# Altium PCB DieuKhienThietBiWinForm.PcbDoc
Units mil, origin at the board's own origin, x right, y up, seen from the top; angles counter-clockwise.
Board outline 5625 x 3706 mil, 2 copper layers (Top Layer, Bottom Layer); 50 components, 61 nets, 206 pads, 6 vias.
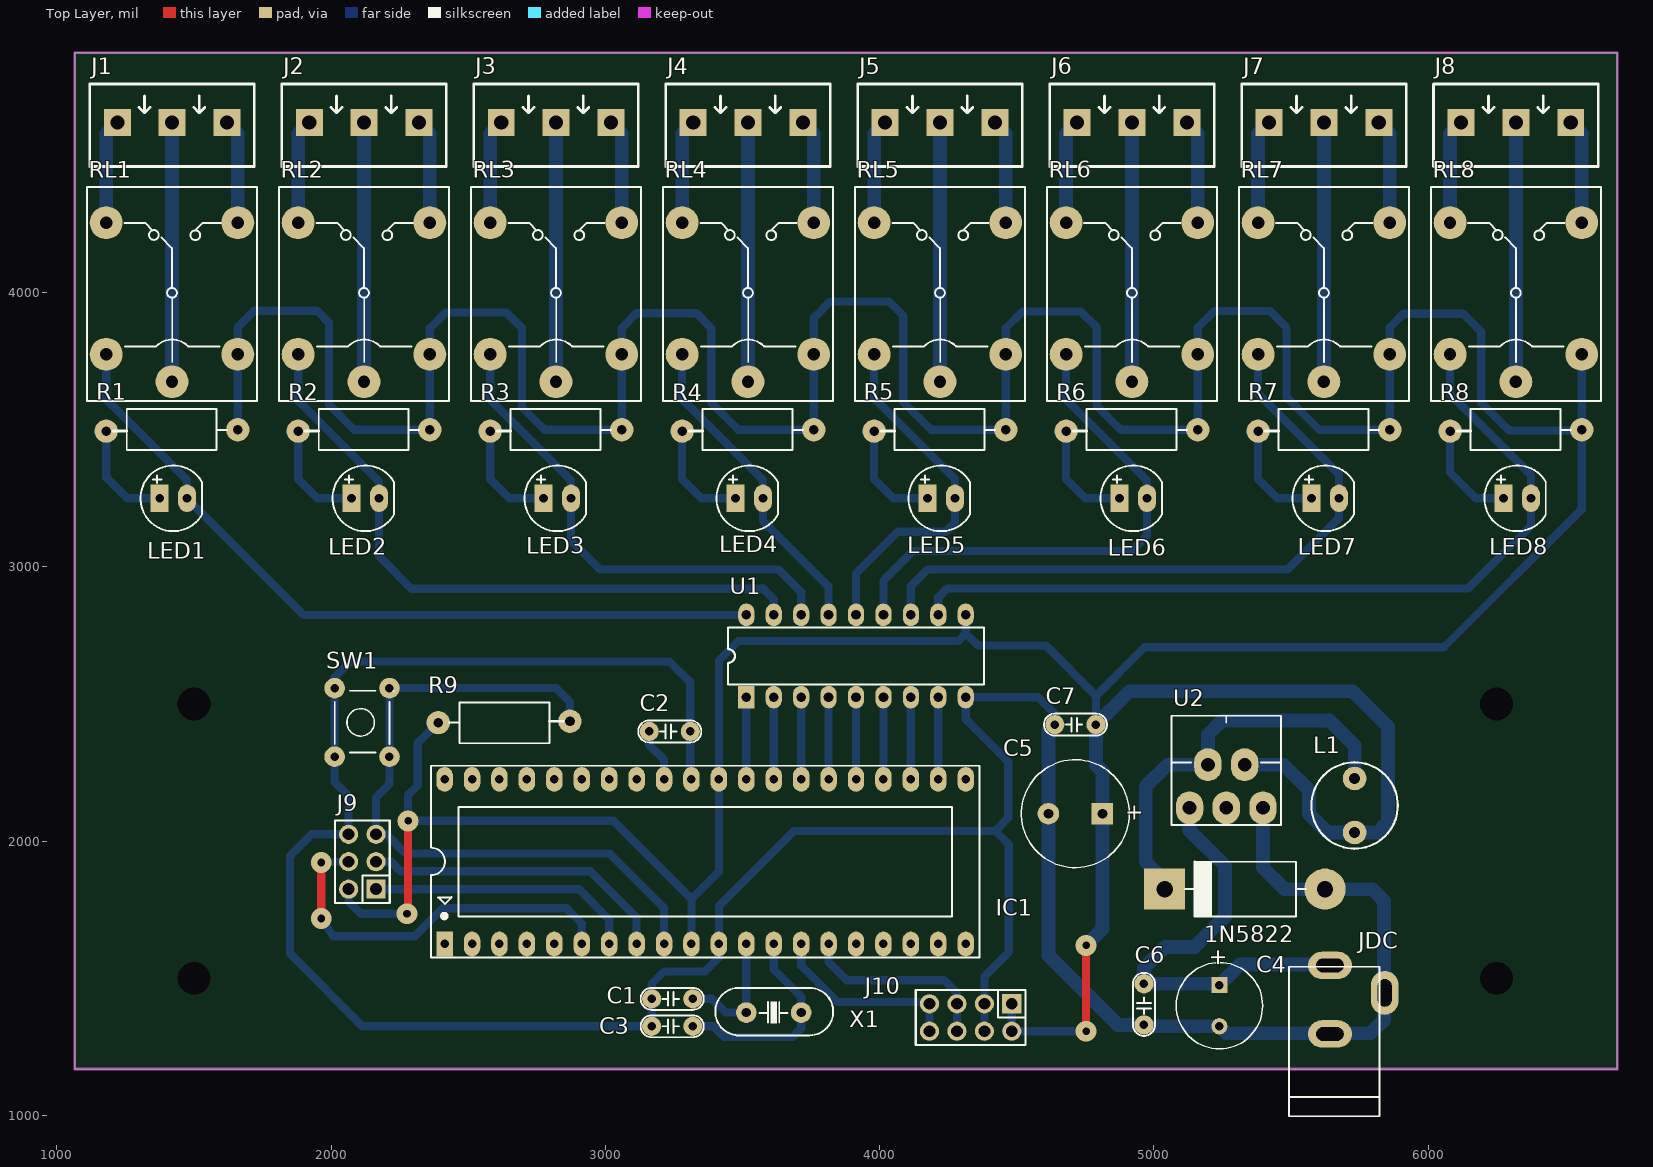
[diagram p0: Top Layer view]
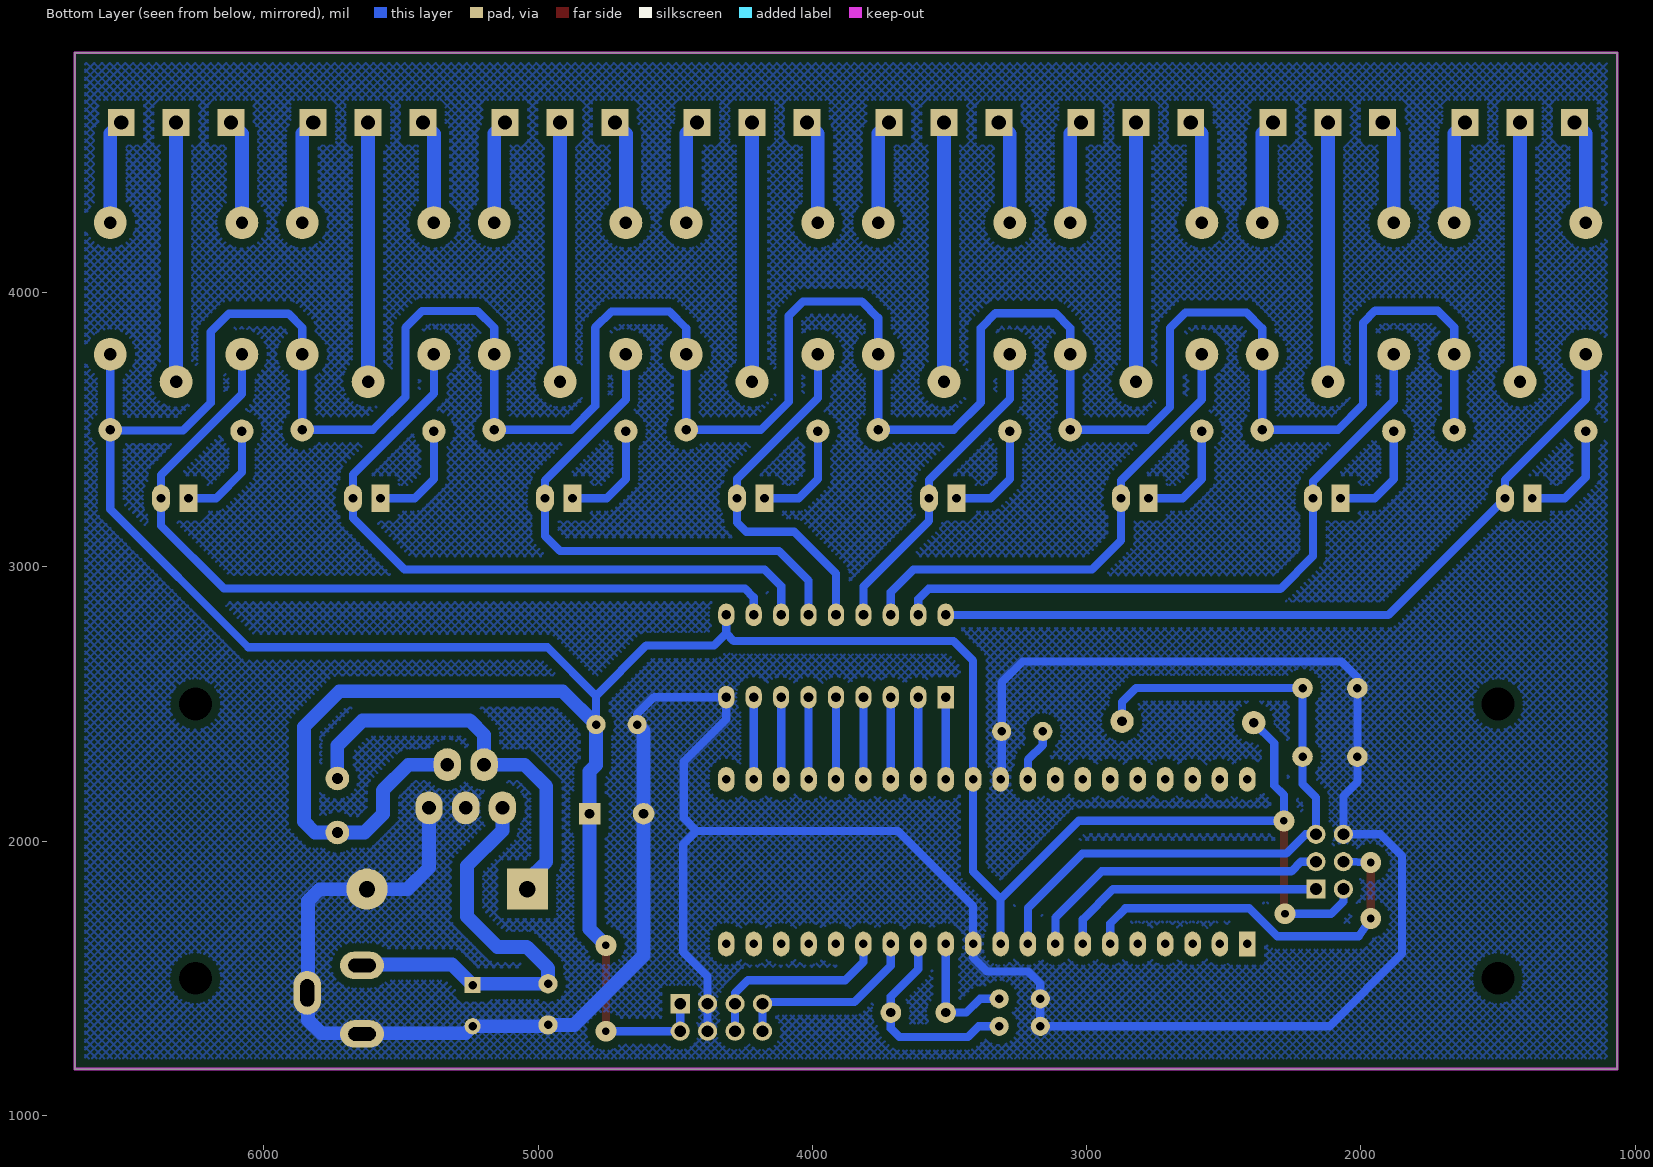
[diagram p1: Bottom Layer view, seen from below]
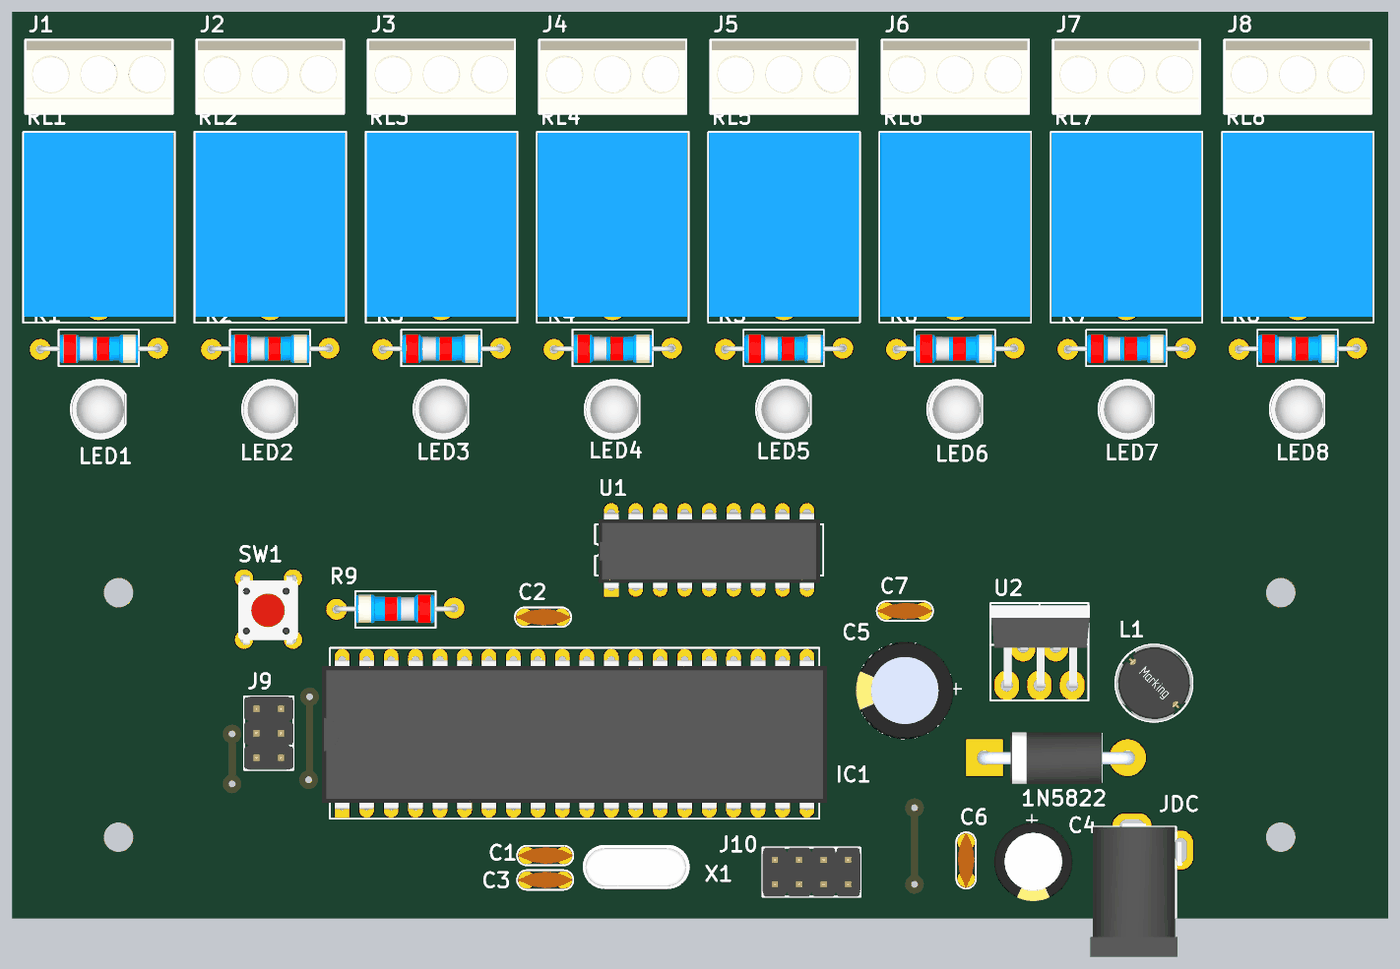
[diagram p2: 3D render of the assembled board from above, using the file's embedded part models]

## Layer stack, top to bottom
Top Solder: solder mask 0.4, Solder Resist, Dk 3.5
Top Layer: signal copper 1.4
Dielectric 1: dielectric 12.6, FR-4, Dk 4.8
Bottom Layer: signal copper 1.4
Bottom Solder: solder mask 0.4, Solder Resist, Dk 3.5

## Board outline
1065,1169 6690,1169 6690,4875 1065,4875

## Design rules (kind name [scope] priority, off if disabled: settings)
Clearance Clearance_3 [InNamedPolygon('Top Layer-No Net')] p1: gap=30 ignorepadtopadclearanceinfootprint=FALSE except(0: Arc-Hole Track-Hole SMDPad-Hole THPad-Hole Via-Hole Fill-Hole Poly-Hole Region-Hole Text-Hole)
Clearance Clearance_2 [InNamedPolygon('Top Layer-No Net')] p2: gap=30 ignorepadtopadclearanceinfootprint=FALSE except(0: Arc-Hole Track-Hole SMDPad-Hole THPad-Hole Via-Hole Fill-Hole Poly-Hole Region-Hole Text-Hole)
Clearance Clearance_1 [InNamedPolygon('Top Layer-No Net')] p3: gap=25 ignorepadtopadclearanceinfootprint=FALSE except(0: Arc-Hole Track-Hole SMDPad-Hole THPad-Hole Via-Hole Fill-Hole Poly-Hole Region-Hole Text-Hole)
Clearance [All] p4: gap=10 ignorepadtopadclearanceinfootprint=FALSE except(0: Arc-Hole Track-Hole SMDPad-Hole THPad-Hole Via-Hole Fill-Hole Poly-Hole Region-Hole Text-Hole)
PolygonConnect PolygonConnect_2 [All vs IsNamedPolygon('Top Layer-No Net')] p1: connectstyle=Direct reliefconductorwidth=10 reliefentries=4 polygonreliefangle="90 Angle" airgapwidth=10
PolygonConnect PolygonConnect_1 [All vs IsNamedPolygon('Top Layer-No Net')] p2: connectstyle=Direct reliefconductorwidth=10 reliefentries=4 polygonreliefangle="90 Angle" airgapwidth=10
PolygonConnect [All] p3: connectstyle=Relief reliefconductorwidth=10 reliefentries=4 polygonreliefangle="90 Angle" airgapwidth=10
RoutingVias [All] p1: holewidth=28 width=50 viastyle="Through Hole" minholewidth=28 minwidth=50 maxholewidth=28 maxwidth=50
SolderMaskExpansion [All] p1: expansion=4
Width [All] p1: maxlimit=50 minlimit=10 preferedwidth=20
30 further rules are at their usual default settings.

## Components (designator, comment, footprint, x,y, rotation, side; value= is the part's Value field where it differs from the comment)
1N5822 "Diode" DIO-5A 5064,1825 r0 top
C1 "22pF" CN1.5 3239,1425 r0 top
C2 "100nF" CN1.5 3230,2400 r0 top
C3 "22pF" CN1.5 3239,1325 r0 top
C4 "220uF" CA-ALU-8 5239,1400 r270 top
C5 "1000uF" CA-ALU-10 4714,2100 r180 top
C6 "100nF" CN1.5 4964,1400 r90 top
C7 "100nF" CN1.5 4709,2425 r0 top
IC1 "ATMEL 16A" DIP40/W0.6 2414,1625 r0 top
J1 "KF3" KF3-5.08 1620,4620 r180 top
J2 "KF3" KF3-5.08 2320,4620 r180 top
J3 "KF3" KF3-5.08 3020,4620 r180 top
J4 "KF3" KF3-5.08 3720,4620 r180 top
J5 "KF3" KF3-5.08 4420,4620 r180 top
J6 "KF3" KF3-5.08 5120,4620 r180 top
J7 "KF3" KF3-5.08 5820,4620 r180 top
J8 "KF3" KF3-5.08 6520,4620 r180 top
J9 "ISP" JP3-D2T 2114,1925 r90 top
J10 "UART" JP4-D2T 4332,1357 r180 top
JDC "Jac DC" DC0 5742,1422 r90 top
L1 "L-DIP-1" L-DIP-M-8 5732,2130 r270 top
LED1 "LED" LED-5-RED 1375,3250 r0 top
LED2 "LED" LED-5-RED 2075,3250 r0 top
LED3 "LED" LED-5-RED 2775,3250 r0 top
LED4 "LED" LED-5-RED 3475,3250 r0 top
LED5 "LED" LED-5-RED 4175,3250 r0 top
LED6 "LED" LED-5-RED 4875,3250 r0 top
LED7 "LED" LED-5-RED 5575,3250 r0 top
LED8 "LED" LED-5-RED 6275,3250 r0 top
R1 "1k" RES-1/2W 1400,3500 r0 top
R2 "1k" RES-1/2W 2100,3500 r0 top
R3 "1k" RES-1/2W 2800,3500 r0 top
R4 "1k" RES-1/2W 3500,3500 r0 top
R5 "1k" RES-1/2W 4200,3500 r0 top
R6 "1k" RES-1/2W 4900,3500 r0 top
R7 "1k" RES-1/2W 5600,3500 r0 top
R8 "1k" RES-1/2W 6300,3500 r0 top
R9 "10k" RES-1/2W 2651,2432 r180 top
RL1 "Relay 10A/12V" "RELAY 5" 1420,4000 r90 top
RL2 "Relay 10A/12V" "RELAY 5" 2120,4000 r90 top
RL3 "Relay 10A/12V" "RELAY 5" 2820,4000 r90 top
RL4 "Relay 10A/12V" "RELAY 5" 3520,4000 r90 top
RL5 "Relay 10A/12V" "RELAY 5" 4220,4000 r90 top
RL6 "Relay 10A/12V" "RELAY 5" 4920,4000 r90 top
RL7 "Relay 10A/12V" "RELAY 5" 5620,4000 r90 top
RL8 "Relay 10A/12V" "RELAY 5" 6320,4000 r90 top
SW1 "RESET" SW2-DIP 2013,2308 r90 top
U1 "ULN2803A" DIP18 3914,2675 r0 top
U2 "LM2576" DIP5 5264,2200 r0 top
X1 "16MHz" XT2 3614,1375 r0 top

## Footprints (in the part's own frame and the unit in brackets; to place one, negate y for a bottom-side part, rotate by r counter-clockwise, add the part's x,y. Pads: shape width x height; smd on the part's side, far side on the other; paste and mask are expansions set on the pad)
CA-ALU-8 [mm] "Polarized capacitors, Aluminum Electrolytic Capacitors, 2-Leads, Body 8x16x3.5x0.5"
  rect 1.5x1.5 hole 0.8: 1(-1.905,0)
  round 1.5 hole 0.8: 2(1.905,0)
  silkscreen extent -4,-4 4,4, body extent -4.1,-4.1 4.1,4.1, height 14.4
CA-ALU-10 [mm] "Polarized capacitors, Aluminum Electrolytic Capacitors, 2-Leads, Body 10x20x5x0.6"
  rect 2x2 hole 0.9: 1(-2.5,0)
  round 2 hole 0.9: 2(2.5,0)
  silkscreen extent -5,-5 5,5, body extent -5.08,-5.08 5.08,5.08, height 20.52
CN1.5 [mil]
  round 70 hole 31: 1(-70,0) 2(80,0)
  silkscreen extent -110,-40 120,40, body extent -110,-33 120,33, height 235
DC0 [mil] "Jac DC input"
  oval 100x160 hole 50 slot 100 at 90 deg: 1(125,100) 2(-125,100)
  oval 160x100 hole 50 slot 100 at 0 deg: 3(25,-100)
  silkscreen extent -425,-80 120,250, body extent -410,-105 134,269, height 434
DIO-5A [mil] "Diode 5A, W 200mil, L 550mil"
  round 150 hole 60: 1(560,0)
  rect 150x150 hole 60: 2(-25,0)
  silkscreen extent 50,-100 490,100, body extent -52,-106 590,103, height 211
DIP5 [mm]
  oval 2.54x3.048 hole 1.27: 1(-3.4,-2) 2(-1.7,2) 3(0,-2) 4(1.7,2) 5(3.4,-2)
  silkscreen extent -5.08,-3.61 5.08,6.53, body extent -4.99,-2.25 5.21,6.31, height 18.81
DIP18 [mm] "DIP; 18 Leads; Row Spacing 7.62 mm; Pitch 2.54 mm"
  rect 1.5x2.1 hole 0.9: 1(-10.16,-3.81)
  oval 1.5x2.1 hole 0.9: 2(-7.62,-3.81) 3(-5.08,-3.81) 4(-2.54,-3.81) 5(0,-3.81) 6(2.54,-3.81) 7(5.08,-3.81) 8(7.62,-3.81) 9(10.16,-3.81) 10(10.16,3.81) 11(7.62,3.81) 12(5.08,3.81) 13(2.54,3.81) 14(0,3.81) 15(-2.54,3.81) 16(-5.08,3.81) 17(-7.62,3.81) 18(-10.16,3.81)
  silkscreen extent -11.85,-2.65 11.85,2.65, body extent -11.49,-4.06 11.5,3.81, height 5.08
DIP40/W0.6 [mil] "40 PIN, W 600mil, Pin to pin 100mil"
  rect 60x90 hole 31: 1(0,0)
  oval 60x90 hole 31: 2(100,0) 3(200,0) 4(300,0) 5(400,0) 6(500,0) 7(600,0) 8(700,0) 9(800,0) 10(900,0) 11(1000,0) 12(1100,0) 13(1200,0) 14(1300,0) 15(1400,0) 16(1500,0) 17(1600,0) 18(1700,0) 19(1800,0) 20(1900,0) 21(1900,600) 22(1800,600) 23(1700,600) 24(1600,600) 25(1500,600) 26(1400,600) 27(1300,600) 28(1200,600) 29(1100,600) 30(1000,600) 31(900,600) 32(800,600) 33(700,600) 34(600,600) 35(500,600) 36(400,600) 37(300,600) 38(200,600) 39(100,600) 40(0,600)
  silkscreen extent -50,-50 1950,650, body extent -82,-10 1982,600, height 224
JP3-D2T [mil] "6 pins, dual pin, straight, gold plating"
  rect 70x70 hole 43.31: 1(-100,-50)
  round 70 hole 43.31: 2(0,-50) 3(100,-50) 4(100,50) 5(0,50) 6(-100,50)
  silkscreen extent -150,-100 150,100, body extent -150,-100 150,100, height 337
JP4-D2T [mil] "8 pins, dual pin, straight, gold plating"
  rect 70x70 hole 43.31: 1(-150,-50)
  round 70 hole 43.31: 2(-50,-50) 3(50,-50) 4(150,-50) 5(150,50) 6(50,50) 7(-50,50) 8(-150,50)
  silkscreen extent -200,-100 200,100, body extent -200,-100 200,100, height 337
KF3-5.08 [mm]
  rect 2.5x2.5 hole 1.3: 1(0,0) 2(5.08,0) 3(10.147,0)
  silkscreen extent -2.54,-3.58 12.7,4.06, body extent -2.42,-3.51 12.58,3.99, height 10
L-DIP-M-8 [mil] "THT Inductor, 2-Leads, Body 8,0  mm"
  round 86 hole 39.37: 1(-98.43,0) 2(98.43,0)
  silkscreen extent -157,-157 157,157, body extent -156,-156 156,156, height 493
LED-5-RED [mil] "LED 2 PIN, 5 ly , Only colour,pin to pin 100mil"
  rect 65x100 hole 32: 1(0,0)
  oval 65x100 hole 32: 2(100,0)
  silkscreen extent -70,-120 154,120, body extent -65,-119 149,118, height 339
"RELAY 5" [mil] "Reley DPDT, 8 pin, 1A, W400mil, L800mil,H 300mil"
  round 120 hole 45: 1(-325,0) 2(255,240) 3(255,-240) 4(-225,-240) 5(-225,240)
  silkscreen extent -395,-310 385,310, body extent -371,-304 381,306, height 602
RES-1/2W [mil]
  round 85 hole 35: 1(-220,-5) 2(260,0)
  silkscreen extent -195,-74 221,75, body extent -230,-60 270,56, height 121
SW2-DIP [mil] "SW button 4pin, 250 x250 mil"
  round 75 hole 31: 1(0,0) 2(0,-200) 3(250,-200) 4(250,0)
  silkscreen extent 15,-215 240,0, body extent -36,-220 276,24, height 276
XT2 [mil] "Footpin for Crystal 2 pin"
  round 75 hole 34: 1(-100,0) 2(100,0)
  silkscreen extent -213,-83 217,90, body extent -216,-87 216,90, height 144

## Part data
1N5822: "Default Diode"
C1 C2 C3 C6 C7: library part CN
C4 C5: library part CN-ALU-DIP, "Capacitor (Semiconductor SIM Model)"
IC1: library part ATmega16A-PU, "8-Bit AVR Microcontroller with 16K Bytes of In-System Programmable Flash Memory"
J9: library part JP3x2, "WR-PHD 2.54 mm Dual Socket Header"
J10: library part JP4x2, "WR-PHD 2.54 mm Dual Socket Header"
JDC: library part DCIN, "Jac DC input"
L1: "Inductor"
LED1 LED2 LED3 LED4 LED5 LED6 LED7 LED8: "LED Single colour Green and Red"
R1 R2 R3 R4 R5 R6 R7 R8 R9: library part Res, "Res"
RL1 RL2 RL3 RL4 RL5 RL6 RL7 RL8: library part "Relay 5", "Relay SPDT,10A - 12VDC 5 Pin"
SW1: library part SW4, "Switch button 4 pin"
U1: "High-Voltage, High-Current Darlington Array"
X1: library part XT2, "Crystal, 32.768 KHz, -40 to 85 degC, 3.2 x 1.5 x 0.9 mm SMD"

## Free pads (board coordinates)
  round 60 hole 120: 2(1500,2500) 3(1500,1500) 4(6250,1500) 5(6250,2500)

## Via types
v1: diameter 76, hole 28, Top Layer to Bottom Layer, tented top, 6 vias

## Nets (pads, with @x,y where several pads share a name; then routed paths per layer and width w, separated by ;. In a path a pad name is that pad's centre, name@x,y a point inside that pad or via, vN(x,y) a via of type N, cw(c..) or ccw(c..) an arc to the next point about the centre after c; other vN are vias at no path point)
GND: 1N5822.1 C1.1 C2.2 C3.1 C4.2 C5.2 C6.1 C7.1 IC1.11 IC1.31 J9.4 J10.2 J10.7 JDC.2 JDC.3 SW1.1 SW1.4 U1.9 U2.3 U2.5 | length 11184
  Bottom Layer w30: IC1.31 3310,2229 C2.2 3310,2578 3233,2655 2071,2655 2013,2597 SW1.4 SW1.1 2013,2216 2064,2165 J9.4 1929,2025 1850,1946 1850,1590 2115,1325 C3.1 C1.1 3169,1480 3214,1525 3364,1525 3414,1575 IC1.11 3414,1763 3688,2037 4422,2037 ; J10.7 J10.2 4382,1507 4471,1596 4471,1988 4422,2037 ; C7.1 4639,2463 4577,2525 U1.9 4314,2445 4469,2290 4469,2084 4422,2037
  Bottom Layer w50: C7.1 4615.57,2401.57 C5.2 4615.57,1583.43 4869,1330 C6.1 4969,1325 C4.2 5264,1300 5791,1300 5839,1348 5839,1782 5796,1825 1N5822.1 5476,1825 5397.86,1903.14 U2.5
MISO: IC1.7 J9.1 | length 985.6
  Bottom Layer w30: J9.1 2904,1825 3014,1715 IC1.7
MOSI: IC1.6 J9.5 | length 1429.1
  Top Layer w30: v1(1964,1718) v1(1964,1922)
  Bottom Layer w30: v1(1964,1718) 2007.84,1653 2305,1653 2407,1755 2859,1755 2914,1700 IC1.6 ; v1(1964,1922) 2063,1926 J9.5
Net1N5822_2: 1N5822.2 L1.1 U2.2 | length 1486.7
  Bottom Layer w50: 1N5822.2 5039,1856 4970,1925 4970,2199 5049.74,2278.74 U2.2 5197.07,2388.07 5249,2440 5641,2440 5732,2349 L1.1
NetC1_2: C1.2 IC1.12 X1.1 | length 465.7
  Bottom Layer w30: C1.2 3389,1425 3439,1375 X1.1 IC1.12
NetC2_1: C2.1 IC1.32 | length 197.4
  Bottom Layer w30: C2.1 3160,2351 3214,2297 IC1.32
NetC3_2: C3.2 IC1.13 X1.2 | length 773.4
  Bottom Layer w30: C3.2 3394,1325 3433,1286 3683,1286 3714,1317 X1.2 3714,1434 3614,1534 IC1.13
NetC4_1: C4.1 C6.2 JDC.1 U2.1 | length 1587.6
  Bottom Layer w50: U2.1 5130.14,2038.86 5259,1910 5259,1725 5148,1614 5041,1614 4964,1537 C6.2 5234,1480 C4.1 5314,1550 JDC.1@5639,1550
NetIC1_22: IC1.22 U1.8 | length 300
  Bottom Layer w30: IC1.22 U1.8
NetIC1_23: IC1.23 U1.7 | length 300
  Bottom Layer w30: IC1.23 U1.7
NetIC1_24: IC1.24 U1.6 | length 300
  Bottom Layer w30: IC1.24 U1.6
NetIC1_25: IC1.25 U1.5 | length 300
  Bottom Layer w30: IC1.25 U1.5
NetIC1_26: IC1.26 U1.4 | length 300
  Bottom Layer w30: IC1.26 U1.4
NetIC1_27: IC1.27 U1.3 | length 300
  Bottom Layer w30: IC1.27 U1.3
NetIC1_28: IC1.28 U1.2 | length 300
  Bottom Layer w30: IC1.28 U1.2
NetIC1_29: IC1.29 U1.1 | length 300
  Bottom Layer w30: IC1.29 U1.1
NetJ1_1: J1.1 RL1.3 | length 381.6
  Bottom Layer w50: J1.1 1660,4580 RL1.3
NetJ1_2: J1.2 RL1.1 | length 945
  Bottom Layer w50: RL1.1 J1.2
NetJ1_3: J1.3 RL1.2 | length 381.8
  Bottom Layer w50: RL1.2 1180,4579.5 J1.3
NetJ2_1: J2.1 RL2.3 | length 381.6
  Bottom Layer w50: J2.1 2360,4580 RL2.3
NetJ2_2: J2.2 RL2.1 | length 945
  Bottom Layer w50: RL2.1 J2.2
NetJ2_3: J2.3 RL2.2 | length 381.8
  Bottom Layer w50: RL2.2 1880,4579.5 J2.3
NetJ3_1: J3.1 RL3.3 | length 381.6
  Bottom Layer w50: J3.1 3060,4580 RL3.3
NetJ3_2: J3.2 RL3.1 | length 945
  Bottom Layer w50: RL3.1 J3.2
NetJ3_3: J3.3 RL3.2 | length 381.8
  Bottom Layer w50: RL3.2 2580,4579.5 J3.3
NetJ4_1: J4.1 RL4.3 | length 381.6
  Bottom Layer w50: J4.1 3760,4580 RL4.3
NetJ4_2: J4.2 RL4.1 | length 945
  Bottom Layer w50: RL4.1 J4.2
NetJ4_3: J4.3 RL4.2 | length 381.8
  Bottom Layer w50: RL4.2 3280,4579.5 J4.3
NetJ5_1: J5.1 RL5.3 | length 381.6
  Bottom Layer w50: J5.1 4460,4580 RL5.3
NetJ5_2: J5.2 RL5.1 | length 945
  Bottom Layer w50: RL5.1 J5.2
NetJ5_3: J5.3 RL5.2 | length 381.8
  Bottom Layer w50: RL5.2 3980,4579.5 J5.3
NetJ6_1: J6.1 RL6.3 | length 381.6
  Bottom Layer w50: J6.1 5160,4580 RL6.3
NetJ6_2: J6.2 RL6.1 | length 945
  Bottom Layer w50: RL6.1 J6.2
NetJ6_3: J6.3 RL6.2 | length 381.8
  Bottom Layer w50: RL6.2 4680,4579.5 J6.3
NetJ7_1: J7.1 RL7.3 | length 381.6
  Bottom Layer w50: J7.1 5860,4580 RL7.3
NetJ7_2: J7.2 RL7.1 | length 945
  Bottom Layer w50: RL7.1 J7.2
NetJ7_3: J7.3 RL7.2 | length 381.8
  Bottom Layer w50: RL7.2 5380,4579.5 J7.3
NetJ8_1: J8.1 RL8.3 | length 381.6
  Bottom Layer w50: J8.1 6560,4580 RL8.3
NetJ8_2: J8.2 RL8.1 | length 945
  Bottom Layer w50: RL8.1 J8.2
NetJ8_3: J8.3 RL8.2 | length 381.8
  Bottom Layer w50: RL8.2 6080,4579.5 J8.3
NetLED1_1: LED1.1 R1.1 | length 394.9
  Bottom Layer w30: R1.1 1180,3327 1257,3250 LED1.1
NetLED1_2: LED1.2 RL1.5 U1.18 | length 2862.2
  Bottom Layer w30: RL1.5 1180,3612 1475,3317 LED1.2 1900,2825 U1.18
NetLED2_1: LED2.1 R2.1 | length 399
  Bottom Layer w30: R2.1 1880,3320 1950,3250 LED2.1
NetLED2_2: LED2.2 RL2.5 U1.17 | length 2419.8
  Bottom Layer w30: RL2.5 1880,3607 2175,3312 LED2.2 2175,3039 2294,2920 3577,2920 3614,2883 U1.17
NetLED3_1: LED3.1 R3.1 | length 399
  Bottom Layer w30: R3.1 2580,3320 2650,3250 LED3.1
NetLED3_2: LED3.2 RL3.5 U1.16 | length 1801.1
  Bottom Layer w30: RL3.5 2580,3610 2875,3315 LED3.2 2875,3096 2981,2990 3632,2990 3714,2908 U1.16
NetLED4_1: LED4.1 R4.1 | length 399
  Bottom Layer w30: R4.1 3280,3320 3350,3250 LED4.1
NetLED4_2: LED4.2 RL4.5 U1.15 | length 1171.2
  Bottom Layer w30: RL4.5 3280,3612 3575,3317 LED4.2 3575,3168 3814,2929 U1.15
NetLED5_1: LED5.1 R5.1 | length 399
  Bottom Layer w30: R5.1 3980,3320 4050,3250 LED5.1
NetLED5_2: LED5.2 RL5.5 U1.14 | length 1324.2
  Bottom Layer w30: U1.14 3914,2976 4066,3128 4241,3128 4275,3162 LED5.2 4275,3321 3980,3616 RL5.5
NetLED6_1: LED6.1 R6.1 | length 399
  Bottom Layer w30: R6.1 4680,3320 4750,3250 LED6.1
NetLED6_2: LED6.2 RL6.5 U1.13 | length 1937.7
  Bottom Layer w30: U1.13 4014,2950 4122,3058 4920,3058 4975,3113 LED6.2 4975,3315 4680,3610 RL6.5
NetLED7_1: LED7.1 R7.1 | length 399
  Bottom Layer w30: R7.1 5380,3320 5450,3250 LED7.1
NetLED7_2: LED7.2 RL7.5 U1.12 | length 2487.9
  Bottom Layer w30: U1.12 4114,2930 4174,2990 5487,2990 5675,3178 LED7.2 5675,3337 5380,3632 RL7.5
NetLED8_1: LED8.1 R8.1 | length 384.4
  Bottom Layer w30: R8.1 6080,3345 6175,3250 LED8.1
NetLED8_2: LED8.2 RL8.5 U1.11 | length 3080.3
  Bottom Layer w30: U1.11 4214,2889 4246,2921 6146,2921 6375,3150 LED8.2 6375,3335 6080,3630 RL8.5
RST: IC1.9 J9.3 R9.1 SW1.2 SW1.3 | length 2595.4
  Bottom Layer w30: R9.1 2871,2507 2820,2558 SW1.3 SW1.2 2213,2208 2164,2159 J9.3 2202,2025 2272,1955 3016,1955 3214,1757 IC1.9
RXI: IC1.14 J10.4 J10.5 | length 704.6
  Bottom Layer w30: IC1.14 3714,1546 3847,1413 4176,1413 J10.4 J10.5
SCK: IC1.8 J9.2 | length 1131.1
  Bottom Layer w30: J9.2 2219,1925 2254,1890 2946,1890 3114,1722 IC1.8
TXO: IC1.15 J10.3 J10.6 | length 719.8
  Bottom Layer w30: IC1.15 3814,1559 3880,1493 4235,1493 4282,1446 J10.3 J10.6
VCC: C5.1 C7.2 IC1.10 IC1.30 J9.6 J10.1 J10.8 L1.2 R1.2 R2.2 R3.2 R4.2 R5.2 R6.2 R7.2 R8.2 R9.2 RL1.4 RL2.4 RL3.4 RL4.4 RL5.4 RL6.4 RL7.4 RL8.4 U1.10 U2.4 | length 21373.5
  Top Layer w30: v1(2277,1735) 2281,1739 v1(2281,2074) ; v1(4753,1307) v1(4753,1620)
  Bottom Layer w30: R1.2 RL1.4 1660,3874 1720,3934 1948,3934 1992,3890 1992,3592 2084,3500 R2.2 RL2.4 2360,3870 2417,3927 2640,3927 2696,3871 2696,3582 2778,3500 R3.2 RL3.4 3060,3871 3114,3925 3332,3925 3386,3871 3386,3599 3485,3500 R4.2 RL4.4 3760,3908 3820,3968 4034,3968 4086,3916 4086,3602 4188,3500 R5.2 RL5.4 4460,3870 4521,3931 4733,3931 4792,3872 4792,3587 4879,3500 R6.2 RL6.4 5160,3872 5221,3933 5423,3933 5484,3872 5484,3619 5603,3500 R7.2 RL7.4 5860,3872 5911,3923 6127,3923 6194,3856 6194,3598 6295,3497 6557,3497 R8.2 ; J9.6 2064,1780 2109,1735 v1(2277,1735) ; R9.2 2316,2357 2316,2203 2281,2168 v1(2281,2074) 3029,2074 3314,1789 ; IC1.10 3314,1789 ; U1.10 4314,2757 ; J10.1 J10.8 v1(4753,1307) ; C7.2@4789,2449 4789,2530 ; RL8.4 R8.2 ; 3314,1789 3414,1889 IC1.30 3414,2658 3486,2730 4287,2730 4314,2757 ; 4314,2757 4315,2757 4359,2713 4606,2713 4789,2530 ; 4789,2530 4966,2707 6057,2707 6560,3210 R8.2
  Bottom Layer w50: v1(4753,1620) 4812.43,1679.43 C5.1 4812.43,2254.43 4789,2277.85 C7.2 4910,2546 5725,2546 5854,2417 5854,2071 5814.57,2031.57 L1.2 5633.43,2031.57 5566,2099 5566,2186 5473.26,2278.74 U2.4
pads on no net: IC1.1 IC1.2 IC1.3 IC1.4 IC1.5 IC1.16 IC1.17 IC1.18 IC1.19 IC1.20 IC1.21 IC1.33 IC1.34 IC1.35 IC1.36 IC1.37 IC1.38 IC1.39 IC1.40

## Polygon pours and split planes (outlines as drawn)
GND on Bottom Layer "Top Layer-No Net" (hatched 45Degree grid 20 track 8, pour order 1): 1065,1169 6690,1169 6690,4875 1065,4875

## Keep-outs
Keep-Out Layer:
  the board outline again, w10

## Text inside footprints (layer, text, board x,y; h text height)
C4: Top Overlay "+" at 5209.98,1609.65 h59.06 r270
C5: Top Overlay "+" at 4963.02,2129.02 h59.06 r180